# Altium PCB base.PcbDoc
Units mm, origin at the board's own origin, x right, y up, seen from the top; angles counter-clockwise.
Board outline 35.4 x 10.1 mm, 2 copper layers (Top Layer, Bottom Layer); 1 components, 14 nets, 15 pads, 15 vias.
Unrouted connection lines stored in the file: 1.
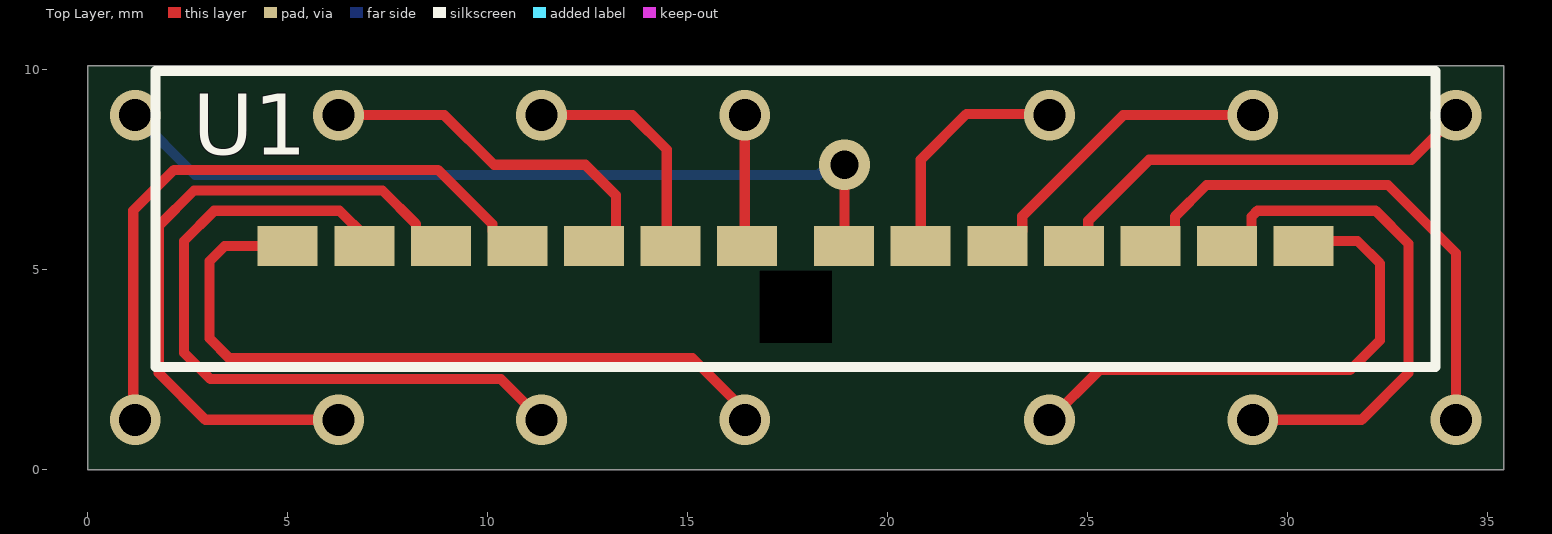
[diagram p0: Top Layer view]
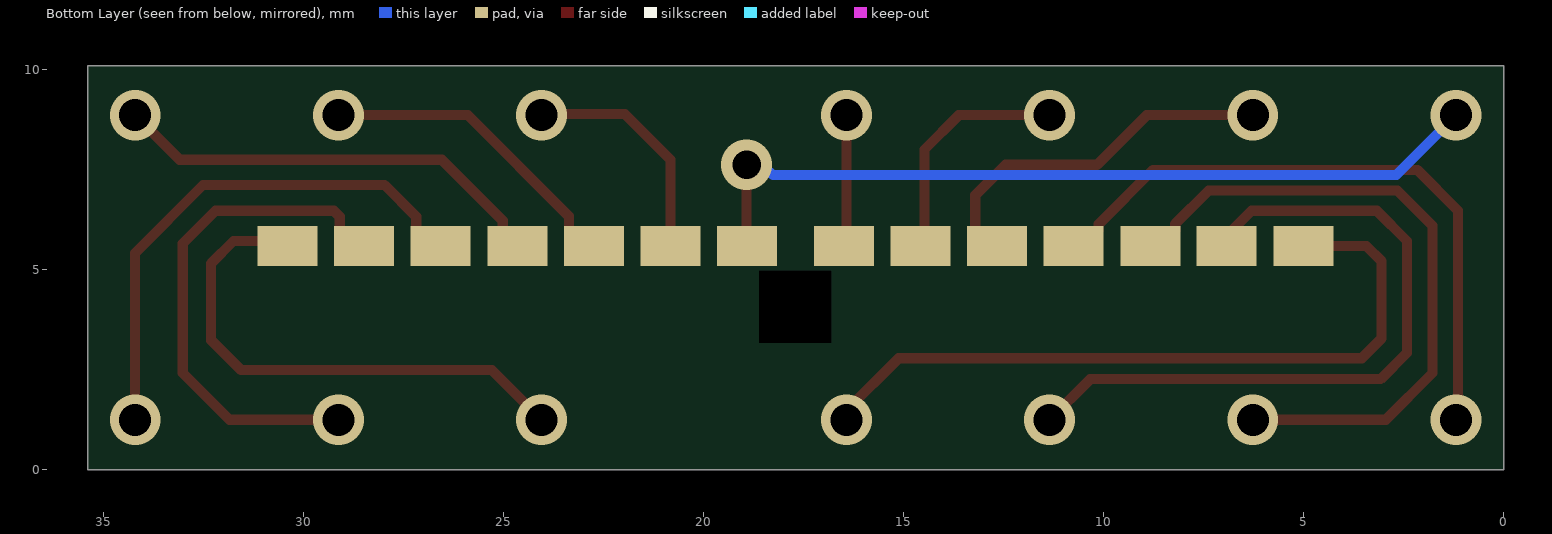
[diagram p1: Bottom Layer view, seen from below]

## Layer stack, top to bottom
Top Solder: solder mask 0.0102, Solder Resist, Dk 3.5
Top Layer: signal copper 0.0356
Dielectric 1: dielectric 0.32, FR-4, Dk 4.8
Bottom Layer: signal copper 0.0356
Bottom Solder: solder mask 0.0102, Solder Resist, Dk 3.5

## Board outline
0,0 35.4,0 35.4,10.1 0,10.1

## Design rules (kind name [scope] priority, off if disabled: settings)
Clearance [All] p1: gap=0.254 ignorepadtopadclearanceinfootprint=FALSE except(0: Arc-Hole Track-Hole SMDPad-Hole THPad-Hole Via-Hole Fill-Hole Poly-Hole Region-Hole Text-Hole)
PolygonConnect [All] p1: connectstyle=Relief reliefconductorwidth=0.254 reliefentries=4 polygonreliefangle="90 Angle" airgapwidth=0.254
RoomDefinition base [InComponentClass('base')] p1: confinementstyle=ConfineIn formatcopy=TRUE lockcomponents=FALSE outline 4.271,2.667 30.052,2.667 30.052,7.747 4.271,7.747
RoutingVias [All] p1: holewidth=0.711 width=1.27 viastyle="Through Hole" minholewidth=0.711 minwidth=1.27 maxholewidth=0.711 maxwidth=1.27
SolderMaskExpansion [All] p1: expansion=0.102 istentingtop=FALSE
Width [All] p1: maxlimit=0.254 minlimit=0.254 preferedwidth=0.254
30 further rules are at their usual default settings.

## Components (designator, comment, footprint, x,y, rotation, side; value= is the part's Value field where it differs from the comment)
U1 "TAKAS" base_takas 17.702,4.064 r0 top

## Footprints (in the part's own frame and the unit in brackets; to place one, negate y for a bottom-side part, rotate by r counter-clockwise, add the part's x,y. Pads: shape width x height; smd on the part's side, far side on the other; paste and mask are expansions set on the pad)
base_takas [mm]
  rect 1.5x1 all layers, no hole: 1(-6.956,1.524) 2(-10.775,1.524) 3(-8.87,1.524) 4(1.211,1.524) 5(-3.126,1.524) 6(-5.041,1.524) 7(-1.211,1.524) 8(-12.7,1.524) 9(10.785,1.524) 10(12.7,1.524) 11(8.87,1.524) 12(5.041,1.524) 13(3.126,1.524) 14(6.956,1.524)
  round 0 hole 1.8 square unplated: 1(0,0)
  silkscreen extent -16,-1.5 16,5.9, body extent -13.97,-0.89 13.97,5.84, height 20

## Via types
v1: diameter 1.27, hole 0.8, Top Layer to Bottom Layer, 14 vias
v2: diameter 1.27, hole 0.711, Top Layer to Bottom Layer, 1 vias

## Nets (pads, with @x,y where several pads share a name; then routed paths per layer and width w, separated by ;. In a path a pad name is that pad's centre, name@x,y a point inside that pad or via, vN(x,y) a via of type N, cw(c..) or ccw(c..) an arc to the next point about the centre after c; other vN are vias at no path point)
+5: U1.7 | length 3.3
  Top Layer w0.254: v1(16.43,8.86) 16.43,5.648 U1.7
C_1.1: U1.2 | length 17.8
  Top Layer w0.254: U1.2 6.927,5.842 6.3,6.469 3.167,6.469 2.413,5.715 2.413,2.921 3.073,2.261 10.334,2.261 v1(11.35,1.245)
C_1.2: U1.5 | length 5.9
  Top Layer w0.254: v1(11.35,8.86) 13.619,8.86 14.478,8.001 14.478,5.686 U1.5
C_2.1: U1.13 | length 5.9
  Top Layer w0.254: U1.13 20.828,7.747 21.971,8.89 24.02,8.89 v1(24.05,8.86)
C_2.2: U1.10 | length 13.2
  Top Layer w0.254: v1(24.05,1.245) 25.29,2.485 31.561,2.485 32.311,3.234 32.311,5.154 31.75,5.715 30.529,5.715 U1.10
GND: U1.8 | length 18.4
  Top Layer w0.254: U1.8 3.429,5.588 3.048,5.207 3.048,3.279 3.544,2.783 15.124,2.783 16.43,1.477 v1(16.43,1.245)
NC_1.1: U1.3 | length 16.8
  Top Layer w0.254: v1(6.27,1.245) 2.946,1.245 1.778,2.413 1.778,6.096 2.659,6.977 7.374,6.977 8.208,6.143 8.208,5.961 8.581,5.588 U1.3
NC_1.2: U1.6 | length 9.4
  Top Layer w0.254: v1(6.27,8.86) 8.92,8.86 10.16,7.62 12.446,7.62 13.208,6.858 13.208,5.961 12.835,5.588 U1.6
NC_2.1: U1.12 | length 8
  Top Layer w0.254: U1.12 22.993,5.588 23.366,5.961 23.366,6.211 ; 23.366,6.212 23.366,6.336 25.891,8.86 v1(29.13,8.86)
NC_2.2: U1.9 | length 13.1
  Top Layer w0.254: U1.9 28.724,5.588 29.097,5.961 29.097,6.32 29.246,6.469 32.201,6.469 33.02,5.65 33.02,2.413 31.852,1.245 v1(29.13,1.245)
NO_1.1: U1.1 | length 16.2
  Top Layer w0.254: v1(1.19,1.245) 1.143,1.292 1.143,6.477 2.159,7.493 8.763,7.493 10.123,6.133 10.123,5.961 10.496,5.588 U1.1@10.746,5.588
NO_1.2: U1.4 | length 20.5
  Top Layer w0.254: U1.4 18.923,5.598 v2(18.923,7.62)
  Bottom Layer w0.254: v1(1.19,8.86) 2.684,7.366 18.266,7.366 18.326,7.426 18.729,7.426 v2(18.923,7.62)
NO_2.1: U1.14 | length 11.1
  Top Layer w0.254: U1.14 25.019,5.949 25.019,6.223 26.543,7.747 33.097,7.747 v1(34.21,8.86)
NO_2.2: U1.11 | length 13.4
  Top Layer w0.254: U1.11 26.81,5.588 27.183,5.961 27.183,6.322 27.972,7.112 32.512,7.112 34.21,5.414 v1(34.21,1.245)